# Altium PCB Airbrake Motor Controller.PcbDoc
Units mil, origin at the board's own origin, x right, y up, seen from the top; angles counter-clockwise.
Board outline 2262.43 x 2259.02 mil, 4 copper layers (Top Layer, Layer 1, Layer 2, Bottom Layer), stack 23.756 mil thick; 98 components, 80 nets, 341 pads, 44 vias.
Unrouted connection lines stored in the file: 179.
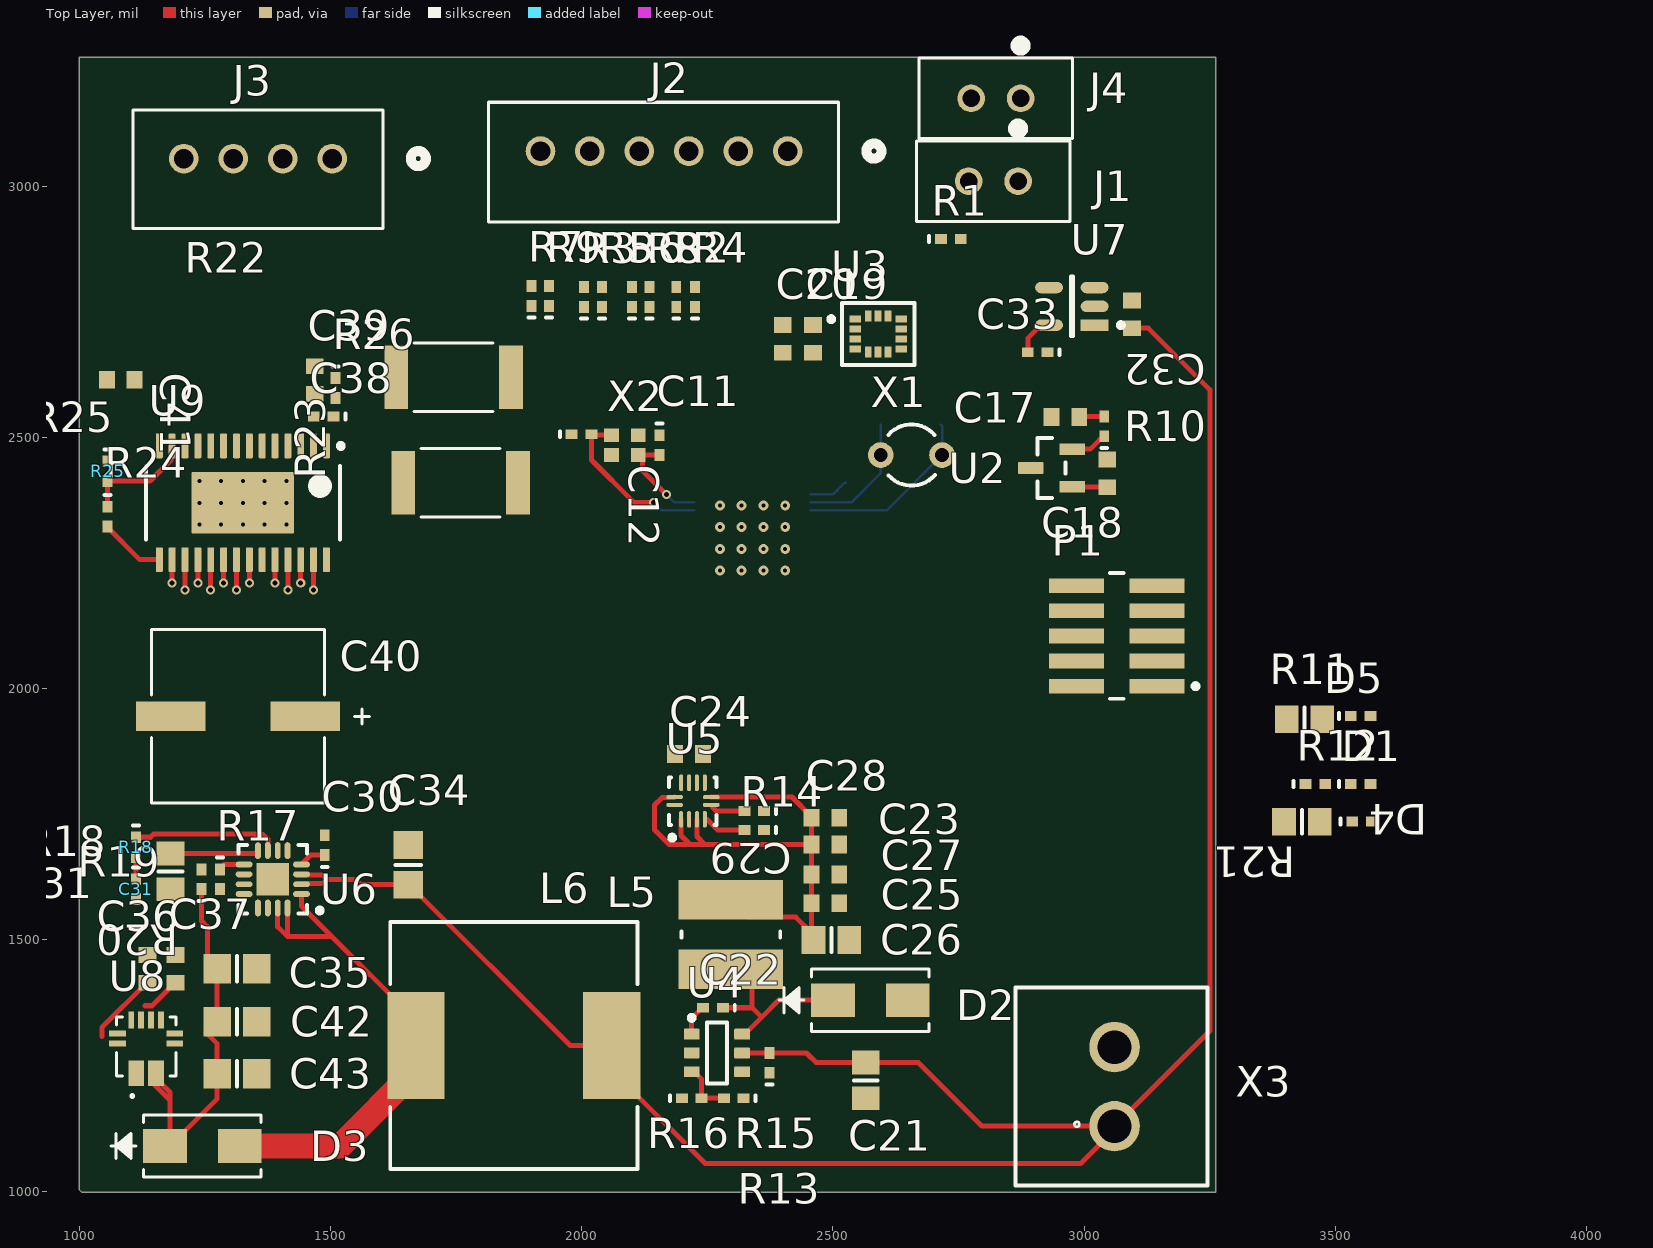
[diagram p0: Top Layer view]
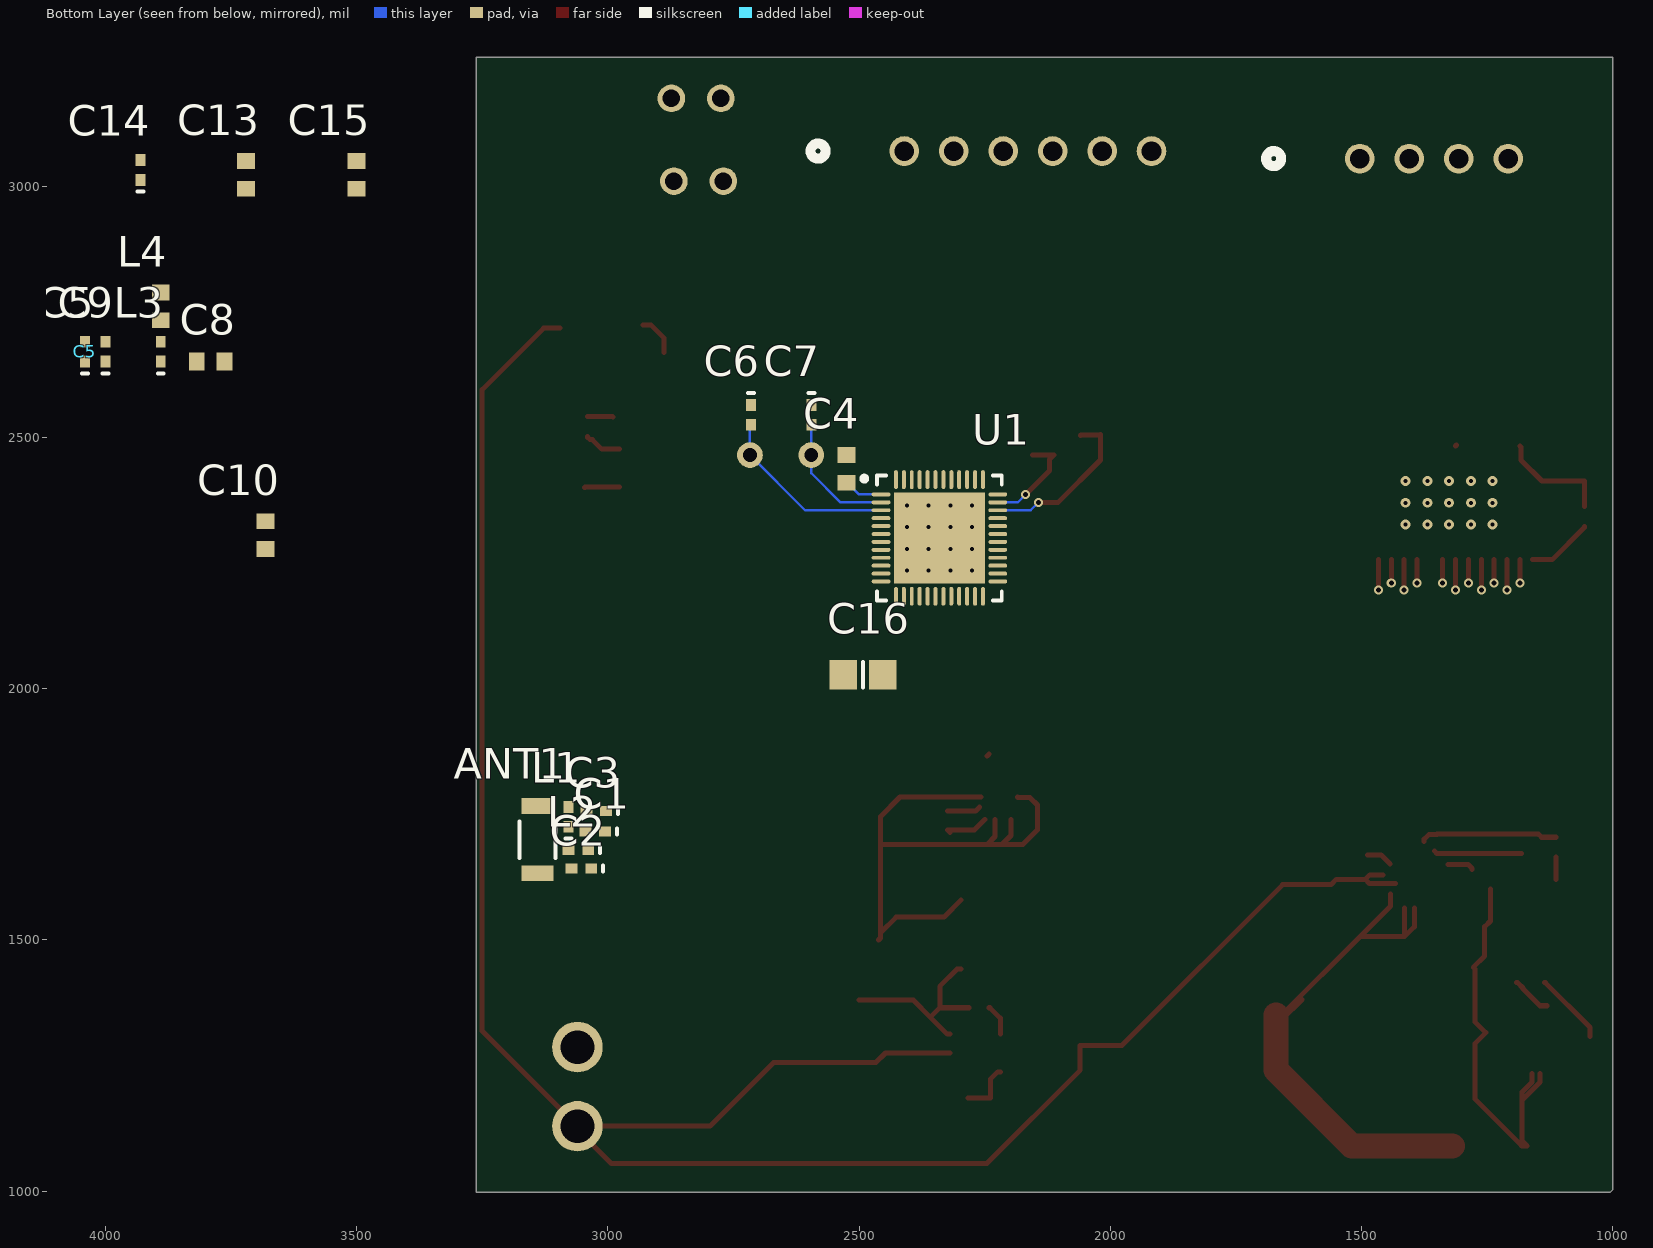
[diagram p1: Bottom Layer view, seen from below]

## Layer stack, top to bottom
Top Solder: solder mask 0.4, Solder Resist, Dk 3.5
Top Layer: signal copper 1.4
Dielectric 2: prepreg 2.8, PP-006, Dk 4.1
Layer 1: signal copper 1.378
Dielectric 1: dielectric 12.6, FR-4, Dk 4.8
Layer 2: signal copper 1.378
Dielectric 3: prepreg 2.8, PP-006, Dk 4.1
Bottom Layer: signal copper 1.4
Bottom Solder: solder mask 0.4, Solder Resist, Dk 3.5

## Board outline
999.57,1003.2 1004.68,998.09 3262,998.09 3262,3257.11 999.57,3257.11

## Design rules (kind name [scope] priority, off if disabled: settings)
Clearance [All] p1: gap=10 ignorepadtopadclearanceinfootprint=FALSE except(0: Arc-Hole Track-Hole SMDPad-Hole THPad-Hole Via-Hole Fill-Hole Poly-Hole Region-Hole Text-Hole)
PolygonConnect [All] p1: connectstyle=Relief reliefconductorwidth=10 reliefentries=4 polygonreliefangle="90 Angle" airgapwidth=10
RoomDefinition Designator [InComponentClass('Designator')] p1: confinementstyle=ConfineIn formatcopy=TRUE lockcomponents=FALSE outline 0,0 2000,0 2000,1000 0,1000
RoomDefinition Designator_1 [InComponentClass('Designator')] p2: confinementstyle=ConfineIn formatcopy=TRUE lockcomponents=FALSE outline 0,0 2000,0 2000,1000 0,1000
RoomDefinition Designator_2 [InComponentClass('Designator')] p3: confinementstyle=ConfineIn formatcopy=TRUE lockcomponents=FALSE outline 0,0 2000,0 2000,1000 0,1000
RoomDefinition Designator_3 [InComponentClass('Designator')] p4: confinementstyle=ConfineIn formatcopy=TRUE lockcomponents=FALSE outline 0,0 2000,0 2000,1000 0,1000
RoomDefinition Designator [InComponentClass('Designator')] p5: confinementstyle=ConfineIn formatcopy=TRUE lockcomponents=FALSE outline 0,0 2000,0 2000,1000 0,1000
RoomDefinition Designator [InComponentClass('Designator')] p6: confinementstyle=ConfineIn formatcopy=TRUE lockcomponents=FALSE outline 0,0 2000,0 2000,1000 0,1000
RoomDefinition Designator [InComponentClass('Designator')] p7: confinementstyle=ConfineIn formatcopy=TRUE lockcomponents=FALSE outline 0,0 2000,0 2000,1000 0,1000
RoutingVias [All] p1: holewidth=28 width=50 viastyle="Through Hole" minholewidth=28 minwidth=50 maxholewidth=28 maxwidth=50
SolderMaskExpansion [All] p1: expansion=4 istentingtop=FALSE
Width [All] p1: maxlimit=50 minlimit=5 preferedwidth=10 midlayer1_minwidth=10 midlayer2_minwidth=10 minimp=50.000000 maximp=50.000000 favimp=50.000000
30 further rules are at their usual default settings.

## Classes and differential pairs
component class Designator: C17 C18 R10 U2

## Components (designator, comment, footprint, x,y, rotation, side; value= is the part's Value field where it differs from the comment)
ANT1 "AMCA31-2R450G-S1F-T3" FP-AMCA31-MFG 3140,1699.68 r270 bottom
C1 "Cap" 0402-A 3025.04,1715.43 r0 bottom value=1.5pF
C2 "Cap" 0402-A 3052.6,1642.06 r0 bottom value=NC
C3 "Cap" 0402-A 3023.07,1756.77 r0 bottom value=0.8pF
C4 "Cap" 1608[0603] 2525,2437.44 r270 bottom value=100nF
C5 "Cap" 0402-A 4040.54,2670.79 r90 bottom value=12pF
C6 "Cap" 0402-A 2715,2545 r270 bottom value=12pF
C7 "Cap" 0402-A 2595,2545 r270 bottom value=12pF
C8 "Cap" 1608[0603] 3790.45,2651.11 r180 bottom value=1uF
C9 "Cap" 0402-A 4000.09,2670.79 r90 bottom value=12pF
C10 "Cap" 1608[0603] 3681.36,2305.69 r90 bottom value=100nF
C11 "Cap" 0402-A 2155,2484.69 r270 top value=12pF
C12 "Cap" 0402-A 1999.68,2506.34 r0 top value=12pF
C13 "Cap" 1608[0603] 3720,3022.44 r90 bottom value=100nF
C14 "Cap" 0402-A 3930,3032.44 r90 bottom value=NC
C15 "Cap" 1608[0603] 3500,3022.44 r90 bottom value=100nF
C16 "Cap" 6-0805_M 2492.27,2028.02 r180 bottom value=4.7uF
C17 "Cap" 1608[0603] 2962.56,2540.75 r180 top value=680pF
C18 "Cap" 1608[0603] 3045.91,2428.38 r90 top value=100nF
C19 "Cap" 1608[0603] 2460,2696.08 r270 top value=100nF
C20 "Cap" 1608[0603] 2400,2696.08 r270 top value=100nF
C21 "Cap" 6-0805_N 2565,1220.43 r90 top value=10uF
C22 "Cap" 0402-A 2261.22,1365 r180 top value=10nF
C23 "Cap" 1608[0603] 2485,1690 r0 top value=100nF
C24 "Cap" 1608[0603] 2213.5,1870 r180 top value=100nF
C25 "Cap" 1608[0603] 2485,1572.91 r180 top value=1uF
C26 "Cap" 6-0805_N 2496.81,1500 r180 top value=10uF
C27 "Cap" 1608[0603] 2485,1630 r180 top value=100nF
C28 "Cap" 1608[0603] 2485,1743.19 r180 top value=100nF
C29 "Cap" 0402-A 2343.35,1756.73 r180 top value=6.8nf
C30 "Cap" 0402-A 1488.47,1688.6 r90 top value=47nF
C31 "Cap" 0402-A 1112.51,1601 r270 top value=166nF
C32 "Cap" 1608[0603] 3095,2745 r270 top value=1uF
C33 "Cap" 0402-A 2907.44,2669.53 r180 top value=2.2uF
C34 "Cap" 6-0805_M 1655,1649.37 r90 top value=4.7uF
C35 "Cap" 6-0805_M 1313.74,1442.45 r0 top value=10uF
C36 "Cap" 1608[0603] 1135.96,1442.45 r90 top value=100nF
C37 "Cap" 1608[0603] 1191.25,1442.45 r90 top value=100nF
C38 "Cap" 0402-A 1486.3,2542.01 r180 top value=12pF
C39 "Cap" 1608[0603] 1468.58,2614.09 r270 top value=100nF
C40 "Cap2" PCAP_8x10-ELECT_NCA 1316,1945 r180 top value=100uF
C41 "Cap" 1608[0603] 1082.44,2615 r0 top value=100nF
C42 "Cap" 6-0805_M 1313.74,1336.97 r0 top value=10uF
C43 "Cap" 6-0805_M 1313.74,1233.79 r0 top value=10uF
D1 "LED1" 0402-A 3550.32,1810.32 r0 top
D2 "Diode 10TQ035" CDBA5 2574.5,1380 r0 top
D3 "Diode 10TQ035" CDBA5 1245,1090 r0 top
D4 "LED1" 0402-A 3553.07,1735.32 r0 top
D5 "LED1" 0402-A 3550.32,1945.32 r0 top (schematic designator D?)
J1 "Thermistor Connector" "CONN_B2B-EH-A (LF)(SN)_JST" 2868.43,3010 r180 top
J2 "Encoder Connector" CONN_B6B-XH-A(LF)(SN)_JST 2410,3070 r180 top
J3 "B4B-XH-A (LF)(SN)" "CONN_B4B-XH-A (LF)(SN)_JST" 1503.43,3055 r180 top
J4 "Limit Switch Connector" "CONN_B2B-EH-A (LF)(SN)_JST" 2873.43,3175 r180 top
L1 "Inductor" 0402-A 3078.19,1744.96 r90 bottom value=3.9nH
L2 "Inductor" 0402-A 3058.51,1679.34 r0 bottom value=3.9nH
L3 "Inductor" 0402-A 3889.86,2670.79 r90 bottom value=15nH
L4 "Inductor" 1608[0603] 3889.86,2760.97 r90 bottom value=10uH
L5 "4.7uH" WE-TPC-4818-M 2296.65,1510.9 r90 top
L6 "10uH" WE-PD-L 1865,1290 r180 top
P1 "SWD" SMTC-FTSH-105-01-L-DV-K_V 3065,2105 r90 top
R1 "Res1" 0402-A 2734.53,2895 r0 top value=1k
R2 "e" 0402-A 2188.19,2779.68 r90 top value=5k
R3 "Res1" 0402-A 2004.79,2779.68 r90 top value=5k
R4 "Res1" 0402-A 2225.2,2779.68 r90 top value=10k
R5 "Res1" 0402-A 2040,2779.68 r90 top value=10k
R6 "Res1" 0402-A 2100,2779.68 r90 top value=5k
R7 "Res1" 0402-A 1900,2781.65 r90 top value=5k
R8 "Res1" 0402-A 2135,2779.68 r90 top value=10k
R9 "Res1" 0402-A 1935,2781.65 r90 top value=10k
R10 "Res1" 0402-A 3040,2522.05 r90 top value=0
R11 "Res1" 6-0805_N 3438.35,1939.41 r180 top value=470 (schematic designator R?)
R12 "Res1" 0402-A 3460,1810.32 r0 top value=150
R13 "Res1" 0402-A 2373.43,1255.32 r90 top value=10k
R14 "Res1" 0402-A 2343.35,1719.13 r180 top value=150k
R15 "Res1" 0402-A 2302.56,1185 r180 top value=16.5k
R16 "Res1" 0402-A 2218.9,1185 r0 top value=10k
R17 "Res1" 0402-A 1279.79,1620.69 r270 top value=78.7K
R18 "Res1" 0402-A 1112.51,1684.66 r270 top value=1.6k
R19 "Res1" 6-0805_N 1181.41,1636.43 r270 top value=1.14k
R20 "Res1" 0402-A 1243.21,1620.69 r90 top value=10k
R21 "Res1" 6-0805_N 3433.19,1735.32 r180 top value=1k
R22 "Res1" RC2512N_PAN 1745,2620 r180 top value=220m
R23 "Res1" RC2512N_PAN 1759.02,2410 r180 top value=220m
R24 "Res1" 0402-A 1056.5,2342.5 r270 top value=10k
R25 "Res1" 0402-A 1056.5,2432.99 r270 top value=10k
R26 "Res1" 0402-A 1509.92,2598.35 r270 top value=1M
U1 "NRF52832-QFAA-R" NRSC-QF-48_M 2340,2300 r180 bottom
U2 "TMP235AQDBZTQ1" FP-DBZ0003A-MFG 2935,2439.2 r180 top
U3 "LSM6DSMTR" FP-LGA-14L-DM00249496-MFG 2590,2705.93 r0 top
U4 "LM2736XMK/NOPB" DDC0006A_L 2269.09,1275 r0 top
U5 "MP5087GG" MP5087GG-Z 2221.38,1776.42 r90 top
U6 "TPS55340QRTERQ1" TPS55340QRTERQ1 1385.11,1620.69 r180 top
U7 "AP2204K-5.0TRG1" FP-SOT25-IPC_B 2975.37,2760.95 r180 top
U8 "ACS70331EESATR-005U3" ALLEGRO_ACS70331EESATR-005U3 1133,1287.76 r90 top
U9 "DRV8825PWP" PWP0028C_L 1325.59,2370 r270 top
X1 "FC-135 32.7680KA-AC" R38 2656.02,2465 r90 top
X2 "XRCGB32M000F1H00R0" XRCGB32M000F1H00R0 2085.83,2484.69 r0 top
X3 "Battery Connector" B2P-VH 3060.39,1208.02 r90 top

## Footprints (in the part's own frame and the unit in brackets; to place one, negate y for a bottom-side part, rotate by r counter-clockwise, add the part's x,y. Pads: shape width x height; smd on the part's side, far side on the other; paste and mask are expansions set on the pad)
6-0805_M [mm] "Chip Resistor, Body 2.0x1.2mm, IPC Low Density"
  rect 1.4x1.5 smd: 1(-1,0) 2(1,0)
  silkscreen extent 0,-0.65 0,0.65, body extent -1.07,-0.7 1.07,0.7, height 0.7
6-0805_N [mm] "Chip Resistor, Body 2.0x1.2mm, IPC Medium Density"
  rect 1.2x1.4 smd: 1(-0.9,0) 2(0.9,0)
  silkscreen extent 0,-0.6 0,0.6, body extent -1.07,-0.7 1.07,0.7, height 0.7
0402-A [mm] "Chip Inductor, Body 1.0x0.5mm, IPC High Density"
  rect 0.6x0.5 smd: 1(-0.5,0) 2(0.5,0)
  silkscreen extent -1.1,-0.15 -1.1,0.15, body extent -0.55,-0.3 0.55,0.3, height 0.55
1608[0603] [mm] "Chip Capacitor, Body 1.6x0.8mm, IPC High Density"
  rect 0.8x0.9 smd: 1(-0.7,0) 2(0.7,0)
  body extent -0.87,-0.48 0.87,0.48, height 1.3
ALLEGRO_ACS70331EESATR-005U3 [mm]
  rect 1.3x0.4 smd: 1(-1.35,0.7) 2(-1.35,0.3) 3(-1.35,-0.3) 4(-1.35,-0.7)
  rect 0.3x0.85 smd: 5(0.15,-1.45) 6(0.65,-1.45) 11(0.65,1.45) 12(0.15,1.45)
  rect 0.85x0.3 smd: 7(1.35,-0.75) 8(1.35,-0.25) 9(1.35,0.25) 10(1.35,0.75)
  silkscreen extent -2.57,-1.5 1.5,1.5
B2P-VH [mm]
  round 2.55 hole 1.7: 1(-2,0) 2(2,0)
  silkscreen extent -5,-4.7 5,5
CDBA5 [mil]
  rect 87x67 smd paste+0 mask+0: 1(-74.5,0) 2(74.5,0)
  silkscreen extent -182,-62 117,62, body extent 0,0 10,10, height 10
"CONN_B2B-EH-A (LF)(SN)_JST" [mil]
  round 55 hole 35 mask+0: 1(0,0) 2(98.43,0)
  silkscreen extent -103,-115 202,80, body extent 0,0 10,10, height 10
"CONN_B4B-XH-A (LF)(SN)_JST" [mil]
  round 59 hole 39 mask+0: 1(0,0) 2(98.43,0) 3(196.86,0) 4(295.29,0)
  silkscreen extent -186,-97 397,139, body extent 0,0 10,10, height 10
CONN_B6B-XH-A(LF)(SN)_JST [mil]
  round 59 hole 39 mask+0: 1(0,0) 2(98.43,0) 3(196.85,0) 4(295.28,0) 5(393.7,0) 6(492.13,0)
  silkscreen extent -186,-97 596,141, body extent 0,0 10,10, height 10
DDC0006A_L [mm] "SOT23, 6-Leads, Body 3.05x1.75mm, Pitch 0.95mm, IPC High Density"
  rrect18% 0.8x0.55 smd: 1(-1.275,0.95) 2(-1.275,0) 3(-1.275,-0.95) 4(1.275,-0.95) 5(1.275,0) 6(1.275,0.95)
  silkscreen extent -1.4,-1.55 0.5,1.9, body extent -1.43,-1.48 1.43,1.49, height 0.9
FP-AMCA31-MFG [mm]
  rect 0.8x1.6 smd paste+0 mask+0: 1(-1.7,0) 2(1.7,0)
  silkscreen extent -0.92,-0.9 0.92,0.9, body extent -1.62,-0.8 1.58,0.8, height 1.4
FP-DBZ0003A-MFG [mm]
  rrect17% 1.3x0.6 smd paste+0 mask+0: 1(-1.05,0.95) 2(-1.05,-0.95) 3(1.05,0)
  silkscreen extent -0.7,-1.52 0.7,1.52, body extent -1.8,-1.62 1.8,1.62, height 0.25
FP-LGA-14L-DM00249496-MFG [mm]
  rect 0.575x0.35 smd paste+0 mask+0: 1(-1.162,0.75) 2(-1.162,0.25) 3(-1.162,-0.25) 4(-1.162,-0.75) 8(1.162,-0.75) 9(1.162,-0.25) 10(1.162,0.25) 11(1.162,0.75)
  rect 0.35x0.575 smd paste+0 mask+0: 5(-0.5,-0.913) 6(0,-0.913) 7(0.5,-0.913) 12(0.5,0.913) 13(0,0.913) 14(-0.5,0.913)
  silkscreen extent -2.5,-1.58 1.83,1.58, body extent -2.05,-1.8 2.05,1.8, height 0.25
FP-SOT25-IPC_B [mm]
  rect 1.407x0.576 smd paste+0 mask+0: 1(-1.151,0.95)
  rrect100% 1.407x0.576 smd paste+0 mask+0: 2(-1.151,0) 3(-1.151,-0.95) 4(1.151,-0.95) 5(1.151,0.95)
  silkscreen extent -2.6,-1.5 0.05,1.5, body extent -1.4,-1.47 1.4,1.45, height 1.45
MP5087GG-Z [mm] "Power Switch/Driver 1:1 P-Channel 7A"
  oval 0.85x0.2 smd: 1(-0.925,0.6) 2(-0.925,0.2) 3(-0.925,-0.2) 4(-0.925,-0.6) 7(0.925,-0.6) 8(0.925,-0.2) 9(0.925,0.2) 10(0.925,0.6)
  oval 0.2x0.85 smd: 5(-0.2,-0.925) 6(0.2,-0.925) 11(0.2,0.925) 12(-0.2,0.925)
  silkscreen extent -1.97,-1.2 1.2,1.2, body extent -1.1,-1.1 1.1,1.1, height 1
NRSC-QF-48_M [mm] "QFN, 48-Leads, Body 6.00x6.00mm, Pitch 0.40mm, Thermal Pad 4.60x4.60mm, IPC Low Density"
  oval 0.95x0.2 smd: 1(-2.95,2.2) 2(-2.95,1.8) 3(-2.95,1.4) 4(-2.95,1) 5(-2.95,0.6) 6(-2.95,0.2) 7(-2.95,-0.2) 8(-2.95,-0.6) 9(-2.95,-1) 10(-2.95,-1.4) 11(-2.95,-1.8) 12(-2.95,-2.2) 25(2.95,-2.2) 26(2.95,-1.8) 27(2.95,-1.4) 28(2.95,-1) 29(2.95,-0.6) 30(2.95,-0.2) 31(2.95,0.2) 32(2.95,0.6) 33(2.95,1) 34(2.95,1.4) 35(2.95,1.8) 36(2.95,2.2)
  oval 0.2x0.95 smd: 13(-2.2,-2.95) 14(-1.8,-2.95) 15(-1.4,-2.95) 16(-1,-2.95) 17(-0.6,-2.95) 18(-0.2,-2.95) 19(0.2,-2.95) 20(0.6,-2.95) 21(1,-2.95) 22(1.4,-2.95) 23(1.8,-2.95) 24(2.2,-2.95) 37(2.2,2.95) 38(1.8,2.95) 39(1.4,2.95) 40(1,2.95) 41(0.6,2.95) 42(0.2,2.95) 43(-0.2,2.95) 44(-0.6,2.95) 45(-1,2.95) 46(-1.4,2.95) 47(-1.8,2.95) 48(-2.2,2.95)
  rect 4.6x4.6 smd: 49(0,0)
  silkscreen extent -3.93,-3.15 3.15,3.15, body extent -3,-3 3,3, height 0.9
PCAP_8x10-ELECT_NCA [mil]
  rect 138x59 smd paste+0 mask+0: 1(-134,0) 2(134,0)
  silkscreen extent -262,-173 173,173, body extent 0,0 10,10, height 10
PWP0028C_L [mm] "SOP, 28-Leads, Body 9.8x4.5mm, Pitch 0.65mm, Thermal Pad 5.18x3.1mm, IPC High Density"
  rrect29% 1.25x0.35 smd: 1(-2.875,4.225) 2(-2.875,3.575) 3(-2.875,2.925) 4(-2.875,2.275) 5(-2.875,1.625) 6(-2.875,0.975) 7(-2.875,0.325) 8(-2.875,-0.325) 9(-2.875,-0.975) 10(-2.875,-1.625) 11(-2.875,-2.275) 12(-2.875,-2.925) 13(-2.875,-3.575) 14(-2.875,-4.225) 15(2.875,-4.225) 16(2.875,-3.575) 17(2.875,-2.925) 18(2.875,-2.275) 19(2.875,-1.625) 20(2.875,-0.975) 21(2.875,-0.325) 22(2.875,0.325) 23(2.875,0.975) 24(2.875,1.625) 25(2.875,2.275) 26(2.875,2.925) 27(2.875,3.575) 28(2.875,4.225)
  rrect3% 3.1x5.18 smd: 29(0,0)
  silkscreen extent -3,-4.9 1.85,5.08, body extent -2.25,-4.9 2.25,4.9, height 1.2
R38 [mm] "Crystal, Thru-Hole; 2 Leads; Body 3.1 x 8.2 mm (Dia.xH)"
  round 1.3 hole 0.7: 1(0,1.55) 2(0,-1.55)
  silkscreen extent -1.55,-1.19 1.55,1.17
RC2512N_PAN [mm]
  rect 1.206x3.2 smd paste+0 mask+0: 1(-2.903,0) 2(2.903,0)
  silkscreen extent -1.99,-1.73 1.99,1.73, body extent 0,0 0.25,0.25, height 0.25
SMTC-FTSH-105-01-L-DV-K_V [mm] "CONN, 10-Leads, Body 6.35x3.43mm, Pitch 1.27mm"
  rect 0.74x2.79 smd: 1(-2.54,-2.035) 2(-2.54,2.035) 3(-1.27,-2.035) 4(-1.27,2.035) 5(0,-2.035) 6(0,2.035) 7(1.27,-2.035) 8(1.27,2.035) 9(2.54,-2.035) 10(2.54,2.035)
  silkscreen extent -3.17,-4.11 3.17,0.34, body extent -3.17,-2.92 3.18,2.92, height 6.12
TPS55340QRTERQ1 [mm] "Boost Switching Regulator IC Positive, Isolation Capable Adjustable 2.9V 1 Output 5.25A (Switch) 16-WFQFN Exposed Pad"
  oval 0.85x0.3 smd: 1(-1.45,0.75) 2(-1.45,0.25) 3(-1.45,-0.25) 4(-1.45,-0.75) 9(1.45,-0.75) 10(1.45,-0.25) 11(1.45,0.25) 12(1.45,0.75)
  oval 0.3x0.85 smd: 5(-0.75,-1.45) 6(-0.25,-1.45) 7(0.25,-1.45) 8(0.75,-1.45) 13(0.75,1.45) 14(0.25,1.45) 15(-0.25,1.45) 16(-0.75,1.45)
  rect 1.66x1.66 smd: 17(0,0)
  silkscreen extent -2.5,-1.73 1.73,1.73, body extent -1.66,-1.66 1.66,1.66, height 0.8
WE-PD-L [mm] "SMD Inductor, 2-Leads, Body 12.0 x 12.0 mm"
  rect 2.9x5.4 smd: 1(-4.95,0) 2(4.95,0)
  silkscreen extent -6.25,-6.25 6.25,6.25, body extent -6,-6 6,6, height 5.98
WE-TPC-4818-M [mm] "SMD Inductor, 2-Leads, Body 4.8 x 4.8 mm"
  rect 2x5.3 smd: 1(-1.75,0) 2(1.75,0)
  silkscreen extent -0.15,-2.5 0.15,2.5, body extent -2.4,-2.4 2.4,2.4, height 1.79
XRCGB32M000F1H00R0 [mm]
  rect 0.75x0.7 smd: 1(-0.675,0.5) 2(0.675,0.5) 3(0.675,-0.5) 4(-0.675,-0.5)
  body extent -1,-0.8 1,0.8, height 0.65

## Part data
ANT1: library part CMP-27836-000002-1, "RF ANT 2.4GHZ CHIP SOLDER SMD", Manufacturer=Abracon, Max Frequency=2450MHz, Package=AMCA31, Power Rating=3W, Temperature="-40°C to +85°C", Temperature Range High=+85°C, Temperature Range Low=-40°C, Automotive=No, Bandwidth=100MHz, Category=Ant, ComponentLink2Description=Datasheet, ComponentLink2URL=https://abracon.com/chip-antenna/AMCA31-2R450G-S1F-T3.pdf, Device Class L1="Integrated Circuits (ICs)", Device Class L2="RF Semiconductors and Devices", Device Class L3="RF Antennas", Digikey Description="RF ANT 2.4GHZ CHIP SOLDER SMD", Height=1.4mm, Impedance=50Ω, Lead Free=Yes, Manufacturer Part Number=AMCA31-2R450G-S1F-T3, Mouser Description="Antennas 2.45GHz BW 90dB + Gain -1 dBi avg.", Number Of Bands=1, Octopart=https://octopart.com/amca31-2r450g-s1f-t3-abracon-31435383, RoHS=TRUE
C1 C2 C3 C4 C5 C6 C7 C8 C9 C10 C11 C12 C13 C14 C15 C16 C17 C18 C19 C20 C21 C22 C23 C24 C25 C26 C27 C28 C29 C30 C31 C32 C33 C34 C35 C36 C37 C38 C39 C40 C41 C42 C43: "Capacitor", Publisher="Altium Limited"
  C1 C2 C3 C4 C5 C6 C7 C8 C9 C10 C11 C12 C13 C14 C15 C16 C17 C18 C19 C20 C21 C22 C23 C24 C25 C26 C27 C28 C29 C30 C31 C32 C33 C34 C35 C36 C37 C38 C39 C41 C42 C43: LatestRevisionDate=17-Jul-2002, LatestRevisionNote="Re-released for DXP Platform.", PackageDescription="Radial Cap, Thru-Hole; 2 Leads; 0.3 in Pin Spacing", PackageReference=RAD-0.3, Published=8-Jun-2000
  C40: PackageDescription="Capacitor; 2 Leads", PackageReference=CAPR5-4X5, Published=23-Sep-2002
D1 D4 D5: "Typical RED GaAs LED", LatestRevisionDate=08-Jul-2005, LatestRevisionNote="Mech Layer 1 removed.", PackageDescription="LED; 2 Leads", PackageReference=LED-1, Published=8-Jun-2000, Publisher="Altium Limited"
D2 D3: "Schottky Rectifier", ComponentLink1Description="Manufacturer Link", ComponentLink1URL=http://www.irf.com/, ComponentLink2Description=Datasheet, ComponentLink2URL=http://www.irf.com/product-info/datasheets/data/10tq.pdf, DatasheetVersion=PD-2.057B, LatestRevisionDate=17-Jul-2002, LatestRevisionNote="Re-released for DXP Platform.", Note="Terminal 2 is the TAB and is electrically connected to the cathode", PackageDescription="TO, Thru-Hole, Vertical, Heatsink Mounted; 3 In-Line Leads (1 Absent); Pitch 2.54 mm", PackageReference=TO-220AC, PackageVersion=Feb-1998, Published=8-Jun-2000, Publisher="Altium Limited"
J1 J4: library part "B2B-EH-A (LF)(SN)", "No Description Available", Built_By=EMA_TJ, Copyright="Copyright (C) 2018 Accelerated Designs. All rights reserved", Manufacturer_Part_Number="B2B-EH-A (LF)(SN)", RefDes=RefDes, SourceLibrary=JST_2019-01-31, Type=DEV, Vendor=JST
J2: library part B6B-XH-A(LF)(SN), "No Description Available", Built_By=EMA_Cory, Copyright="Copyright (C) 2018 Accelerated Designs. All rights reserved", Manufacturer_Part_Number=B6B-XH-A(LF)(SN), RefDes=RefDes, SourceLibrary=JST_2019-12-02, Type=DEV, Vendor=JST
J3: "No Description Available", Built_By=EMA_Cory, Copyright="Copyright (C) 2018 Accelerated Designs. All rights reserved", Datasheet=http://www.jst-mfg.com/product/pdf/eng/eXH.pdf, Manufacturer_Part_Number="B4B-XH-A (LF)(SN)", RefDes=RefDes, SourceLibrary=JST_2020-02-03, Type=DEV, Vendor=JST
L5: library part CMP-0227-00330-1, "SMD Shielded Tiny Power Inductor WE-TPC, L = 4.70 µH", Inductance="4.70 ÂµH", ComponentLink1Description="Manufacturer Link", ComponentLink1URL=http://www.we-online.com, ComponentLink2Description=Datasheet, ComponentLink2URL=http://www.we-online.de/katalog/media/pdf/744042004.pdf, DatasheetVersion="ver 6, Aug-2010", PackageDescription="SMD Inductor, 2-Leads, Body 4.8 x 4.8 mm", PackageReference=WE-TPC-4818-M, PackageVersion=2010
L6: library part CMP-0227-00708-1, "SMD-Shielded Power Inductor WE-PD, L = 10.0 µH", Inductance="10.0 ÂµH", ComponentLink1Description="Manufacturer Link", ComponentLink1URL=http://www.we-online.com, ComponentLink2Description=Datasheet, ComponentLink2URL=http://www.we-online.de/katalog/media/pdf/74477110.pdf, DatasheetVersion="ver 7, Sep-2006", PackageDescription="SMD Inductor, 2-Leads, Body 12.0 x 12.0 mm", PackageReference=WE-PD-L, PackageVersion=2006
P1: library part CMP-2000-05353-1, "Male Header, Pitch 1.27 mm, 2 x 5 Position, Height 6.25 mm", Color=Black, Manufacturer=Samtec, Package Description="Male Header, Pitch 1.27 mm, 2 x 5 Position, Height 5.97 mm, Tail Length 4.32 mm", Package Reference=FTSH-105-01-L-DV-K, Standard Package=1, Category=Connectors,Interconnects, Connector Type=Header,Unshrouded, Contact Finish=Gold, Contact Finish Thickness=10µin(0.25µm), Contact Mating Length="0.120\"(3.05mm)", Contact Type=MalePin, Datasheet URL=http://suddendocs.samtec.com/prints/ftsh-1xx-xx-xxx-dv-xxx-mkt.pdf, Datasheet Version="Rev. ET, 10/1995", Family=RectangularConnectors-Headers,MalePins, Manufacturer URL=http://www.samtec.com/, Mating Products="SFMC-105-L2-S-D-TR-ND / -CONN.05\"SURFACE10POSSMT / FLE-105-01-G-DV-TR-ND / -CONNSKT1.27MM10POSDUALSMD / FLE-105-01-G-DV-A-P-ND / -CONNSKT1.27MM10POSDUALSMD / FLE-105-01-G-DV-A-ND / -CONNSKT1.27MM10POSDUALSMD / CLP-105-02-G-D-P-TR-ND / -CONNRCPT10POSDUAL.05\"SMD / SAM1155-05-ND / -CONNRCPT10POSDUAL.05\"SMD / SAM1154-05-ND / -CONNRCPT10POSDUAL.05\"SMD / SAM1153-05-ND / -CONNRCPT10POSDUAL.05\"SMD / SAM1226-05-ND / -CONNRCPT.05\"10POSDUALSMD", Mounting Type=SurfaceMount, Number of Positions=10, Number of Positions Loaded=All, Number of Rows=2, Other Names=Q3937619, Package URL=http://suddendocs.samtec.com/prints/ftsh-1xx-xx-xxx-dv-xxx-footprint.pdf, Packaging=Tube, Pitch="0.050\"(1.27mm)", Product Training Modules=Board-to-BoardConnectors, Row Spacing="0.050\"(1.27mm)", Series=FTSH, Termination=Solder
R1 R3 R4 R5 R6 R7 R8 R9 R10 R11 R12 R13 R14 R15 R16 R17 R18 R19 R20 R21 R22 R23 R24 R25 R26: "Resistor", LatestRevisionDate=17-Jul-2002, LatestRevisionNote="Re-released for DXP Platform.", PackageDescription="Axial Device, Thru-Hole; 2 Leads; 0.3 in Pin Spacing", PackageReference=AXIAL-0.3, Published=8-Jun-2000, Publisher="Altium Limited"
R2: library part Res1, "Resistor", LatestRevisionDate=17-Jul-2002, LatestRevisionNote="Re-released for DXP Platform.", PackageDescription="Axial Device, Thru-Hole; 2 Leads; 0.3 in Pin Spacing", PackageReference=AXIAL-0.3, Published=8-Jun-2000, Publisher="Altium Limited"
U1: library part CMP-2100-03661-1, "Multiprotocol Bluetooth Smart, ANT/ANT+ and Proprietary System-on-Chip, 2.4 GHz, 256 KB FLASH, 1.7 to 3.6 V, -40 to 85 degC, 48-Pin QFN, RoHS, Tape and Reel", Frequency=2.4GHz, Manufacturer="Nordic Semiconductor", Max Operating Temperature=85degC, Min Operating Temperature=-40degC, Package Description="48-Pin Quad Flat No-lead Package, Body 6 x 6 mm, Pitch 0.4 mm, Thermal Pad 4.6 x 4.6 mm", Package Reference=QF-48, Datasheet URL=http://infocenter.nordicsemi.com/pdf/nRF52832_PS_v1.0.pdf, Datasheet Version="Rev. 1.0, 02/2016", Lead Free=LeadFree, Manufacturer URL=http://www.nordicsemi.com/eng/Products/, Max Frequency=2.4GHz, Mount=SurfaceMount, Packaging=TapeandReel, RoHSCompliant=true
U2: library part CMP-04948-000003-1, "LOW-POWER HIGH-ACCURACY ANALOG O", Ambient Temperature Range High=+150°C, Ambient Temperature Range Low=-40°C, Manufacturer="Texas Instruments", Manufacturer Part Number=TMP235A2DBZR, Max Supply Voltage=5.5V, Min Supply Voltage=2.3V, Operating Supply Current=9uA, Output Current=500uA, Package=DBZ0003A, Temperature="-40°C to +150°C", Accuracy=0.5%, Automotive=No, Category=IC, ComponentLink2Description=Datasheet, ComponentLink2URL=http://www.ti.com/lit/ds/symlink/tmp235.pdf, Device Class L1=Sensors, Device Class L2="Temperature and Humidity Sensors", Device Class L3=unset, Digikey Description="LOW-POWER HIGH-ACCURACY ANALOG O", Height=1.12mm, Lead Free=Yes, Max Junction Temp=+150°C, Mouser Description="±2°C Analog output temperature sensor, with 10mV /°C gain 3-SOT-23 -40 to 150", Octopart=https://octopart.com/tmp235a2dbzr-texas+instruments-94966376, RoHS=TRUE, Sensor Output="Analog Voltage", Standoff Height=0.01mm, Temperature Range High=+150°C, Temperature Range Low=-40°C
U3: library part CMP-12177-000008-1, "IMU ACCEL/GYRO I2C/SPI 14LGA", Manufacturer=STMicroelectronics, Max Supply Voltage=3.6V, Min Supply Voltage=1.62V, Operating Supply Current=0.29-0.65mA, Package=LGA-14L-DM00249496, Temperature="-40°C to +85°C", Temperature Range High=+85°C, Temperature Range Low=-40°C, Accel Range=2/4/8/16g, Automotive=No, Category=IC, ComponentLink2Description=Datasheet, ComponentLink2URL=https://www.st.com/resource/en/datasheet/lsm6dsm.pdf, Device Class L1=Sensors, Device Class L2="Motion Sensors", Device Class L3="Inertial Measurement Units (IMUs)", Digikey Description="IMU ACCEL/GYRO I2C/SPI 14LGA", Footprint Url=https://www.st.com/content/ccc/resource/technical/document/technical_note/73/17/9c/16/dd/96/4a/01/CD00134799.pdf/files/CD00134799.pdf/jcr:content/translations/en.CD00134799.pdf, Gyro Range=125/250/500/1000/2000°/s, Height=0.86mm, Lead Free=Yes, Manufacturer Part Number=LSM6DSMTR, Mouser Description="LSM6DSM Series 3.6 V I2C/SPI 3D Accelerometer and 3D Gyroscope - LGA-14", Octopart=https://octopart.com/lsm6dsmtr-stmicroelectronics-66358194, Resolution=16bits, RoHS=TRUE, Sensor Output=I2C,SPI, Sensor Type=Temperature,Accelerometer,Gyroscope
U4: library part CMP-0069-01211-3, "750mA Load Step-Down DC-DC Regulator, 6-pin Tiny SOT23, Pb-Free", Manufacturer="Texas Instruments", PackageTopMarking=SHAB*XTT, PowerWise=N, Code_IPC=SOT26A-6, Code_JEDEC=MO-193-AA, ComponentLink1Description="Datasheet URL", ComponentLink1URL=http://www.ti.com/general/docs/lit/getliterature.tsp?genericPartNumber=LM2736&fileType=pdf, CompType=Switcher, PackageDescription="Molded TSOT, 2.97 x 1.65 x 0.87mm Body, 6 Lead, 0.95mm Pitch", PackageReference=DDC0006A, PinCount=6, RoHS=Y
U5: library part Component_1
U7: library part CMP-12756-000033-1, "IC REG LINEAR 5V 150MA SOT23-5", Case/Package=SOT-23-5, Dropout Voltage=360mV, Max Input Voltage=24V, Max Operating Temperature=85°C, Max Output Current=250mA, Min Input Voltage=2.3V, Min Operating Temperature=-40°C, Operating Supply Current=50uA, Output Current=150mA, Output Voltage=5V, Package Quantity=3000, Power Supply Rejection Ratio (PSRR)=60dB, Reference Voltage=1.265V, Height=1.3mm, Lead Free="Lead Free", Length=3.02mm, Mount="Surface Mount", Number of Outputs=1, Number of Pins=5, Number of Regulators=1, Output Type=Fixed, Packaging="Tape and Reel", Polarity=Positive, Quiescent Current=50uA, Weight=0.001058oz, Width=1.7mm
U8: "Current Sensor 5A 1 Channel Hall Effect, Open Loop Unidirectional 12-PowerWQFN", Package="WFQFN-12 Allegro MicroSystems LLC", Digi-Key_Part_Number=620-1888-1-ND, Digi-Key_Purchase_URL=https://www.digikey.com/product-detail/en/allegro-microsystems/ACS70331EESATR-005U3/620-1888-1-ND/8120688?utm_source=snapeda&utm_medium=aggregator&utm_campaign=symbol, MF="Allegro MicroSystems LLC", MP=ACS70331EESATR-005U3, SnapEDA_Link=https://www.snapeda.com/parts/ACS70331EESATR-005U3/Allegro%20MicroSystems%20LLC/view-part/2732756/?ref=snap
U9: library part CMP-1685-00019-1, "Stepper Motor Controller IC, 8.2 to 45 V, -40 to 85 degC, 28-Pin HTSSOP (PWP), Green (RoHS & no Sb/Br), Tube", Capacitance="47 uF", Case\Package=Radial, Max Operating Temperature="85 degC", Min Operating Temperature="-40 degC", Package Quantity=200, Tolerance=20%, Voltage Rating="100 V", ComponentLink1Description="Manufacturer URL", ComponentLink1URL=http://www.ti.com/, ComponentLink2Description=Datasheet, ComponentLink2URL=http://www.ti.com/general/docs/lit/getliterature.tsp?genericPartNumber=DRV8825&fileType=pdf, DatasheetVersion="SLVSA73F, 07/2014", Diameter="8 mm", Height="11.5 mm", Lead Pitch="3.5 mm", Length="11.5 mm", Mount="Through Hole", PackageDescription="28-Pin Small Outline Package Integrated Circuit, Body 9.7 x 4.4 mm, Pitch 0.65 mm", PackageReference=PWP0028C, Packaging=Bulk, Pins=2, Radiation Hardening=No, REACH SVHC="No SVHC", RoHSCompliant=true, Voltage Rating (DC)="100 V", Width="8 mm"
X1: library part XTAL, "32.768kHz Crystal Oscillator", Supplier Part Number 1=FC-13532.7680KA-AC-ND, LatestRevisionDate=17-Jul-2002, LatestRevisionNote="Re-released for DXP Platform.", PackageDescription="Crystal, Thru-Hole; 2 Leads; Body 3.1 x 8.2 mm (Dia.xH)", PackageReference=R38, Published=8-Jun-2000, Publisher="Altium Limited", Supplier 1=Digi-Key
X2: "32MHz Crystal Oscillator", Supplier Part Number 1=490-17328-1-ND, Supplier 1=Digi-Key
X3: library part B2P-VH(LF)(SN), "Connector Header Through Hole 2 position 0.156 _3.96mm_", Package=None, Availability=Unavailable, MF="JST Sales", MP=B2P-VH_LF__SN_, Price=None, SnapEDA_Link=https://www.snapeda.com/parts/B2P-VH%28LF%29%28SN%29/JST%20Sales%20America%20Inc./view-part/104373/?ref=snap
L1 L2 L3 L4: Code_IEC=1005, Code_JEITA=0402, LatestRevisionDate=29-May-2009, LatestRevisionNote="IPC-7351 Footprint Added.", PackageDescription="Chip Inductor", PackageReference=0402-A, Published=8-Jun-2000, Publisher="Altium Limited"

## Via types
v1: diameter 19.68, hole 7.87, Top Layer to Bottom Layer, 31 vias
v2: diameter 18, hole 10, Top Layer to Bottom Layer, 13 vias

## Nets (pads, with @x,y where several pads share a name; then routed paths per layer and width w, separated by ;. In a path a pad name is that pad's centre, name@x,y a point inside that pad or via, vN(x,y) a via of type N, cw(c..) or ccw(c..) an arc to the next point about the centre after c; other vN are vias at no path point)
3V3: C10.1 C15.1 C16.1 C18.1 C19.2 C20.2 C24.1 C36.1 P1.1 R12.1 U1.13 U1.36 U1.48 U2.1 U3.5 U3.8 U5.7 U8.12 | length 221.8
  Top Layer w10: 1044.98,1307.46 1044.98,1325.87 1133.99,1414.89 C36.1 ; C24.1 C24.1@2245,1866.06 ; U2.1 3044.92,2401.8 C18.1
5V0: C33.2 J1.1 J2.1 R11.2 U7.5 | length 81.1
  Top Layer w10: C33.2 2887.76,2697.6 2913.71,2723.55 U7.5
7V4: C21.2 C32.2 C34.1 L6.1 R13.2 U4.5 U6.2 U6.3 U7.1 U7.3 X3.1 | length 4519.8
  Top Layer w10: U6.2@1432.79,1612.06 1483.91,1612.06 1492.53,1620.69 ; U6.3@1456.97,1629.68 1483.53,1629.68 1492.53,1620.69 ; U4.5 R13.2 2447.38,1275 2466.52,1255.87 C21.2 2670,1255.87 2796.58,1129.28 X3.1 ; C32.2 3127.56,2717.44 3250,2595 3250,1318.89 X3.1 ; 1492.53,1620.69 1550,1620.69 1560.69,1610 C34.1 1656.97,1610 1976.97,1290 L6.1 2059.88,1240.79 2245.67,1055 2992.87,1055 3060.39,1122.53 X3.1
12V0: C39.1 C40.1 C41.2 R21.2 R26.1 U8.1 U8.2 U9.4 U9.11
CP2: C38.2 U9.2
DCC: L4.2 U1.47
DEC2: C14.1 U1.32
DEC3: C13.1 U1.33
EA+: J2.3 R2.2
EA-: J2.4 R6.2
EB+: J2.5 R3.2
EB-: J2.6 R7.2
GND: C1.1 C2.1 C3.1 C4.1 C5.2 C6.1 C7.1 C8.1 C9.2 C10.2 C11.1 C12.1 C13.2 C14.2 C15.2 C16.2 C17.2 C18.2 C19.1 C20.1 C21.1 C23.2 C24.2 C25.1 C26.1 C27.1 C28.1 C29.1 C30.2 C31.2 C32.1 C33.1 C34.2 C35.2 C36.2 C37.2 C40.2 C41.1 C42.2 C43.2 D1.2 D4.2 D5.2 J2.2 P1.3 P1.5 P1.7 P1.9 R1.2 R4.2 R5.2 R8.2 R9.2 R14.1 R16.1 R17.2 R19.2 R22.1 R23.1 R25.1 U1.31 U1.45 U1.49 U2.3 U3.2 U3.3 U3.6 U3.7 U4.2 U5.2 U6.5 U6.6 U6.10 U6.11 U6.12 U6.13 U6.14 U7.2 U8.5 U9.14 U9.28 U9.29 X2.2 X2.4 X3.2
  other v1: 2275.04,2235.04 2318.35,2235.04 2361.65,2235.04 2404.96,2235.04 2275.04,2278.35 2318.35,2278.35 2361.65,2278.35 2404.96,2278.35 2275.04,2321.65 2318.35,2321.65 2361.65,2321.65 2404.96,2321.65 1238.98,2326.69 1282.28,2326.69 1325.59,2326.69 1368.9,2326.69 1412.2,2326.69 2275.04,2364.96 2318.35,2364.96 2361.65,2364.96 2404.96,2364.96 1238.98,2370 1282.28,2370 1325.59,2370 1368.9,2370 1412.2,2370 1238.98,2413.31 1282.28,2413.31 1325.59,2413.31 1368.9,2413.31 1412.2,2413.31
NetANT1_1: ANT1.1 C2.2 L2.2
NetC1_2: C1.2 L1.2 L2.1
NetC3_2: C3.2 L1.1 U1.30
NetC4_2: C4.2 U1.1 | length 78.5
  Bottom Layer w5: U1.1 2499.76,2386.61 2523.03,2409.88 C4.2
NetC5_1: C5.1 U1.37
NetC8_2: C8.2 L3.1 U1.46
NetC9_1: C9.1 U1.38
NetC17_1: C17.1 R10.2 U1.4 | length 50.3
  Top Layer w10: C17.1 2991.1,2541.73 R10.2
NetC22_1: C22.1 D2.1 L5.1 U4.6 | length 393
  Top Layer w10: C22.1 2339.21,1365 ; L5.1 2304.84,1442 2339.21,1407.63 2339.21,1365 ; U4.6 2324.21,1312.4 2358.01,1346.2 ; D2.1 2391.81,1380 2358.01,1346.2 ; 2339.21,1365 2358.01,1346.2
NetC22_2: C22.2 U4.1 | length 63.1
  Top Layer w10: U4.1 2218.9,1344.33 2239.57,1365 C22.2
NetC23_1: C23.1 C25.2 C26.2 C27.2 C28.2 L5.2 R15.1 U5.1 U5.3 U5.6 U5.11 | length 1185.1
  Top Layer w10: U5.11 2183.9,1783.23 2159.68,1783.23 2145,1768.54 2145,1719.13 2174.13,1690 2215.71,1690 ; U5.1 2197.76,1707.95 2215.71,1690 ; U5.3 2229.25,1705.75 2245,1690 ; U5.6 2418.31,1784.29 2457.44,1745.16 C28.2 C23.1 ; L5.2 2331.02,1545.43 2426,1545.43 C26.2@2457.44,1513.99 ; C26.2 2457.44,1503.94 C26.2@2457.44,1513.99 ; 2215.71,1690 2245,1690 ; 2245,1690 C23.1 ; C26.2@2457.44,1513.99 C25.2 C27.2 C23.1
NetC29_2: C29.2 U5.5 | length 66.5
  Top Layer w10: 2260.28,1764.29 2267.85,1756.73 C29.2
NetC30_1: C30.1 U6.4 | length 52.3
  Top Layer w10: U6.4@1443.42,1651.43 1460.9,1668.91 C30.1
NetC31_1: C31.1 R18.2 | length 44.3
  Top Layer w10: C31.1 R18.2
NetC35_1: C35.1 C42.1 C43.1 D3.1 R20.1 U8.3 U8.4 | length 818.4
  Top Layer w10: U8.3 1144.81,1216.89 1180.5,1181.2 ; U8.4 1160.56,1216.89 1180.5,1196.95 1180.5,1181.2 ; R20.1 1243.21,1537.84 1254.76,1526.28 1254.76,1467.96 1277.32,1445.4 C35.1 C42.1 1252.72,1315.32 1274.37,1293.66 C43.1 1274.37,1183.87 1184.81,1094.31 1180.5,1090 D3.1 1180.5,1100 1180.5,1181.2
NetC37_1: C37.1 U1.5 U8.10 | length 80.5
  Top Layer w10: 1130.56,1368.97 1144.72,1368.97 1178.54,1402.78 1178.54,1404.14 1189.28,1414.89 C37.1
NetC38_1: C38.1 U9.1
NetC39_2: C39.2 R26.2 U9.3
NetD1_1: D1.1 R12.2
NetD3_3: D3.2 L6.2 U6.1 U6.15 U6.16 | length 1130.9
  Top Layer w10: U6.15 1394.95,1526.11 1414.64,1506.42 ; U6.16 1414.64,1506.42 ; U6.1 1442.2,1567.13 1502.91,1506.42 ; L6.2@1618.03,1381.44 1658.51,1340.96 1658.51,1350.82 1502.91,1506.42 ; 1414.64,1506.42 1502.91,1506.42
  Top Layer w50: D3.2 1519.33,1090 1670.12,1240.79 L6.2 L6.2@1670.12,1350.82
NetD4_1: D4.1 R21.1
NetD5_1: D5.1 R11.1
NetJ1_2: J1.2 R1.1 U1.6
NetJ3_1: J3.1
NetJ3_2: J3.2
NetJ3_3: J3.3 U9.8 | length 2.7
  Top Layer w10: U9.8@1310.91,2485.08 U9.8
NetJ3_4: J3.4 U9.10
NetL3_2: L3.2 L4.1
NetR2_1: R2.1 R4.1 U1.40
NetR3_1: R3.1 R5.1 U1.42
NetR6_1: R6.1 R8.1 U1.41
NetR7_1: R7.1 R9.1 U1.43
NetR10_1: R10.1 U2.2 | length 75.5
  Top Layer w10: U2.2 3011.9,2476.61 3030.84,2495.55 3035.16,2495.55 3040,2500.39 R10.1
NetR13_1: R13.1 U4.4
NetR14_2: R14.2 U1.7 U5.4 | length 89.9
  Top Layer w10: 2249.25,1740 2270.12,1719.13 R14.2 R14.2@2318.82,1714.29
NetR15_2: R15.2 R16.2 U4.3 | length 107.9
  Top Layer w10: U4.3 2223.82,1237.6 2238.58,1222.83 R16.2 R15.2
NetR17_1: R17.1 U6.9 | length 53.5
  Top Layer w10: R17.1 1279.79,1642.34 1287.67,1650.21 U6.9
NetR18_1: R18.1 U6.7 | length 274.2
  Top Layer w10: R18.1 1141.5,1704.35 1147.64,1710.49 1349.44,1710.49 1349.68,1710.25 1365.42,1710.25 1375.27,1700.41 1375.27,1698.48 1375.27,1695.64
NetR19_1: R19.1 R20.2 U6.8 | length 174.9
  Top Layer w10: R19.1 1349.68,1671.87 U6.8@1354.36,1676.55
NetR22_2: R22.2 U9.6
NetR23_2: R23.2 U9.9
NetR24_1: R24.1 R25.2 U9.12 U9.13 | length 223.6
  Top Layer w10: R24.1 R25.2 1140.91,2413.31 1182.95,2455.35 1182.95,2481.3 U9.13
NetR24_2: R24.2 U9.15 | length 131.2
  Top Layer w10: R24.2 1056.5,2320.85 1120.54,2256.81 U9.15
NetU1_8: U1.8 U9.21 | length 60.5
  Top Layer w10: v2(1312.8,2196.31) U9.21
NetU1_9: U1.9 U9.22 | length 46.3
  Top Layer w10: v2(1338.39,2210.51) U9.22
NetU1_10: U1.10 U9.20 | length 46.3
  Top Layer w10: v2(1287.2,2210.51) U9.20
NetU1_11: U1.11 U9.19 | length 60.5
  Top Layer w10: v2(1261.61,2196.31) U9.19
NetU1_12: U1.12 U9.17 | length 60.5
  Top Layer w10: v2(1210.43,2196.31) U9.17
NetU1_14: U1.14 U9.16 | length 46.3
  Top Layer w10: v2(1184.84,2210.51) U9.16
NetU1_15: U1.15 U9.27 | length 60.5
  Top Layer w10: v2(1466.34,2196.31) U9.27
NetU1_16: U1.16 U9.18 | length 46.3
  Top Layer w10: v2(1236.02,2210.51) U9.18
NetU1_17: U1.17 U9.24 | length 46.3
  Top Layer w10: v2(1389.57,2210.51) U9.24
NetU1_18: U1.18 U9.25 | length 60.5
  Top Layer w10: v2(1415.16,2196.31) U9.25
NetU1_19: U1.19 U9.26 | length 46.3
  Top Layer w10: v2(1440.75,2210.51) U9.26
NetU1_22: U1.22 U3.13
NetU1_27: U1.27 U3.14
NetU1_28: U1.28 U3.1
NetU1_29: U1.29 U3.12
NetU1_39: U1.39
nRESET: P1.10 U1.24
SDWIO: P1.2 U1.26
SWDCLK: P1.4 U1.25
SWO: P1.6 U1.21
XC1: C12.2 U1.34 X2.1 | length 340
  Top Layer w10: X2.1 2058.27,2505.35 2020.35,2505.35 C12.2 2019.37,2455.13 2103.63,2370.87 v2(2142.87,2370.87)
  Bottom Layer w5: v2(2142.87,2370.87) 2158.62,2355.12 U1.34
  Bottom Layer w10: v2(2142.87,2370.87) v2@2145.04,2370.87
XC2: C11.2 U1.35 X2.3 | length 208.3
  Top Layer w10: C11.2 X2.3 2121.02,2456.38 2121.02,2434.06 v2(2168.46,2386.61)
  Bottom Layer w5: v2(2168.46,2386.61) 2184.21,2370.87 U1.35
  Bottom Layer w10: v2(2168.46,2386.61) v2@2170.63,2386.61
XL1: C7.2 U1.2 X1.1 | length 259.4
  Bottom Layer w5: U1.2 2537.13,2370.87 2595,2428.74 X1.1 C7.2
XL2: C6.2 U1.3 X1.2 | length 367.6
  Bottom Layer w5: U1.3 2607.17,2355.12 X1.2 2717.05,2523.27 C6.2
pads on no net: ANT1.2 D2.2 J4.1 J4.2 P1.8 U1.20 U1.23 U1.44 U3.4 U3.9 U3.10 U3.11 U5.8 U5.9 U5.10 U5.12 U6.17 U7.4 U8.6 U8.7 U8.8 U8.9 U8.11 U9.5 U9.7 U9.23

## Text inside footprints (layer, text, board x,y; h text height)
C40: Mechanical 7 "0.043in/1.092mm" at 993,1957.5 h25 r180
J3: Mechanical 7 "0.098in/2.5mm" at 1560.07,2816.14 h25 r180; Mechanical 7 "0in/0mm" at 991.78,3067.5 h25 r180